# Altium PCB RelayBoard-multi.PcbDoc
Units mm, origin at the board's own origin, x right, y up, seen from the top; angles counter-clockwise.
Board outline 158.5 x 178.44 mm, 4 copper layers (L1, L2, L3, L4); 90 components, 72 nets, 343 pads, 15 vias.
Unrouted connection lines stored in the file: 1.
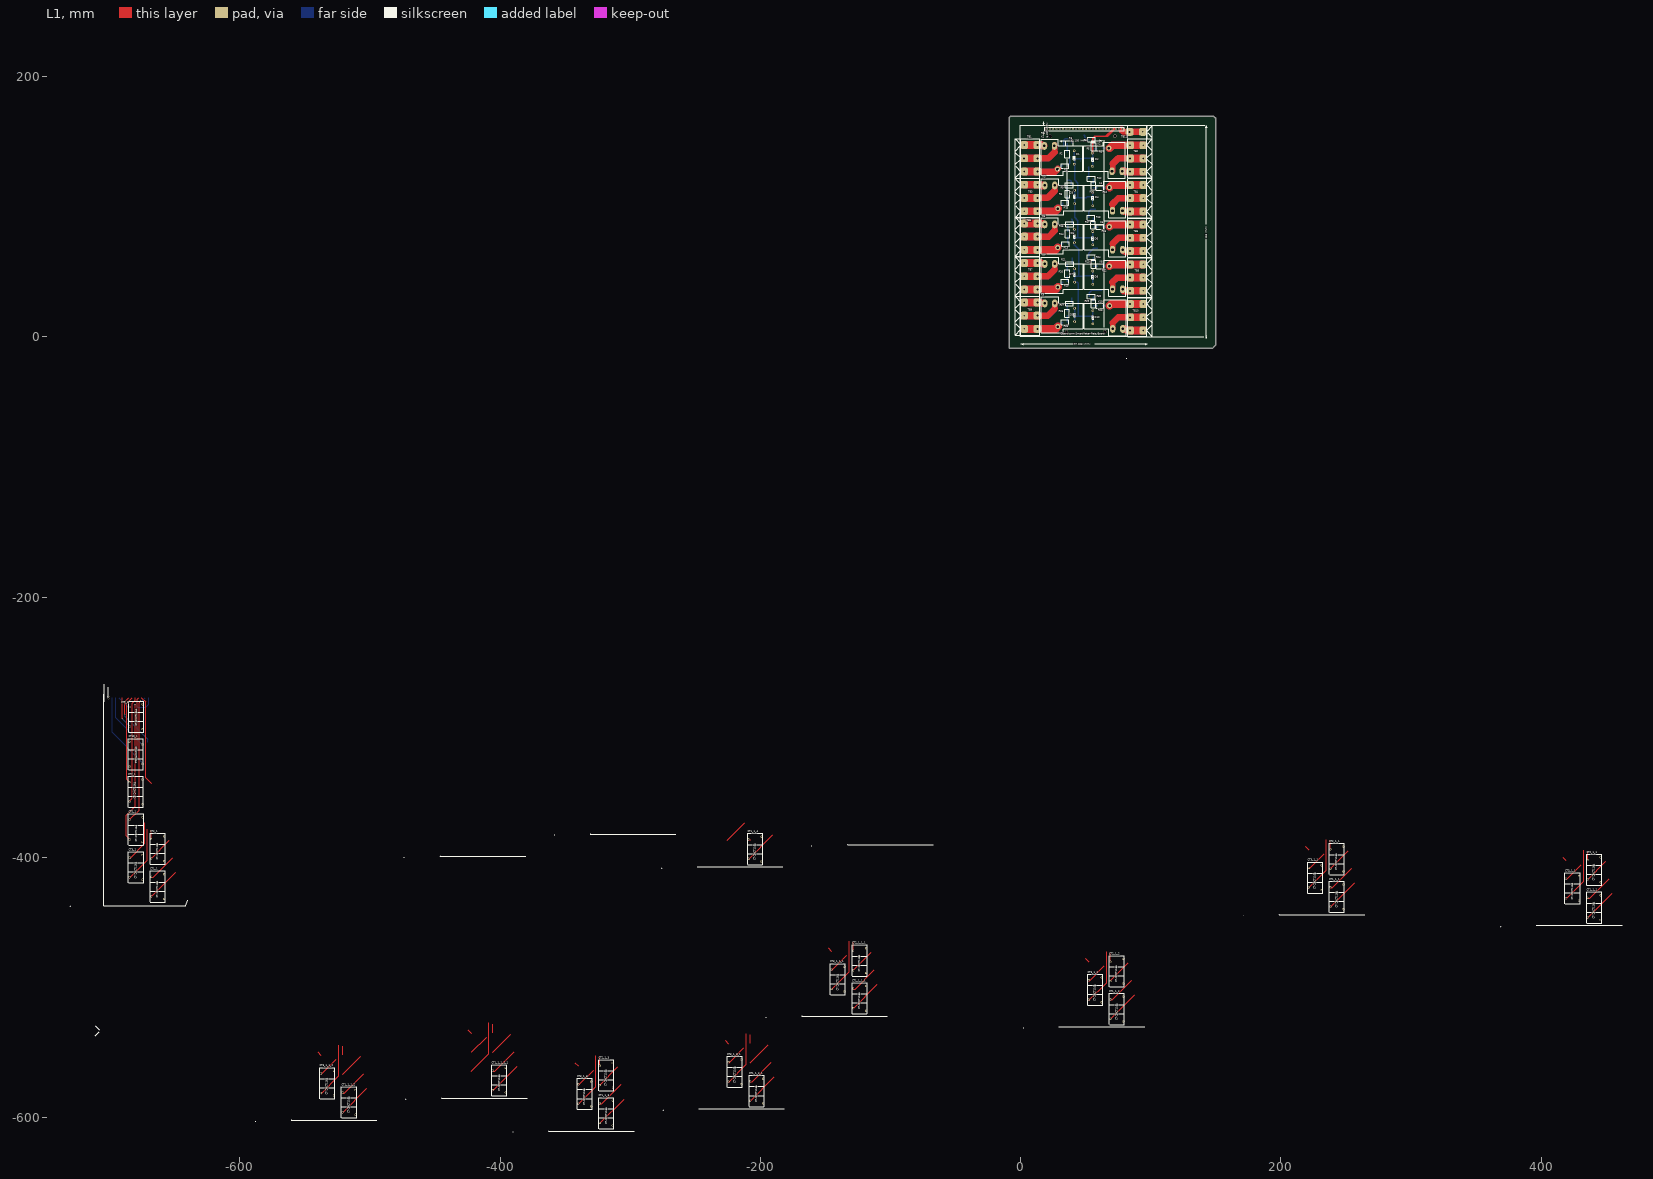
[diagram p0: L1 view]
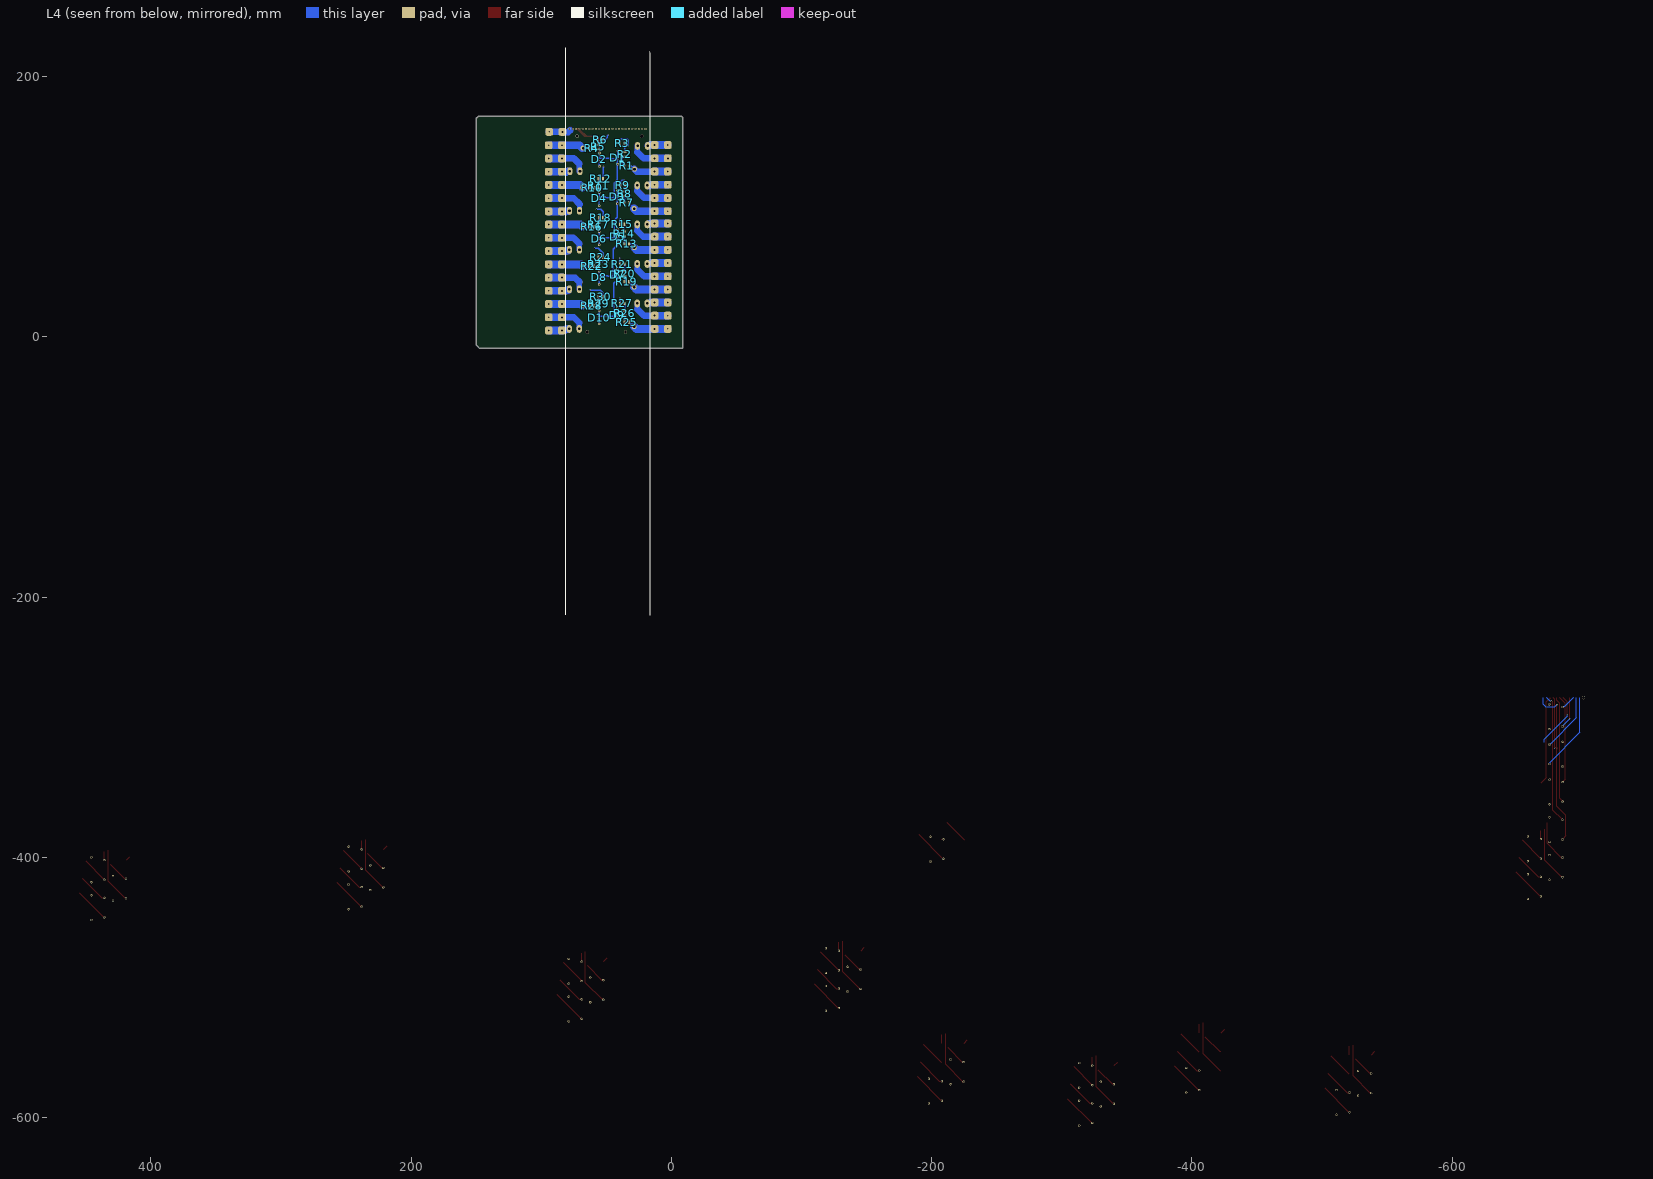
[diagram p1: L4 view, seen from below]
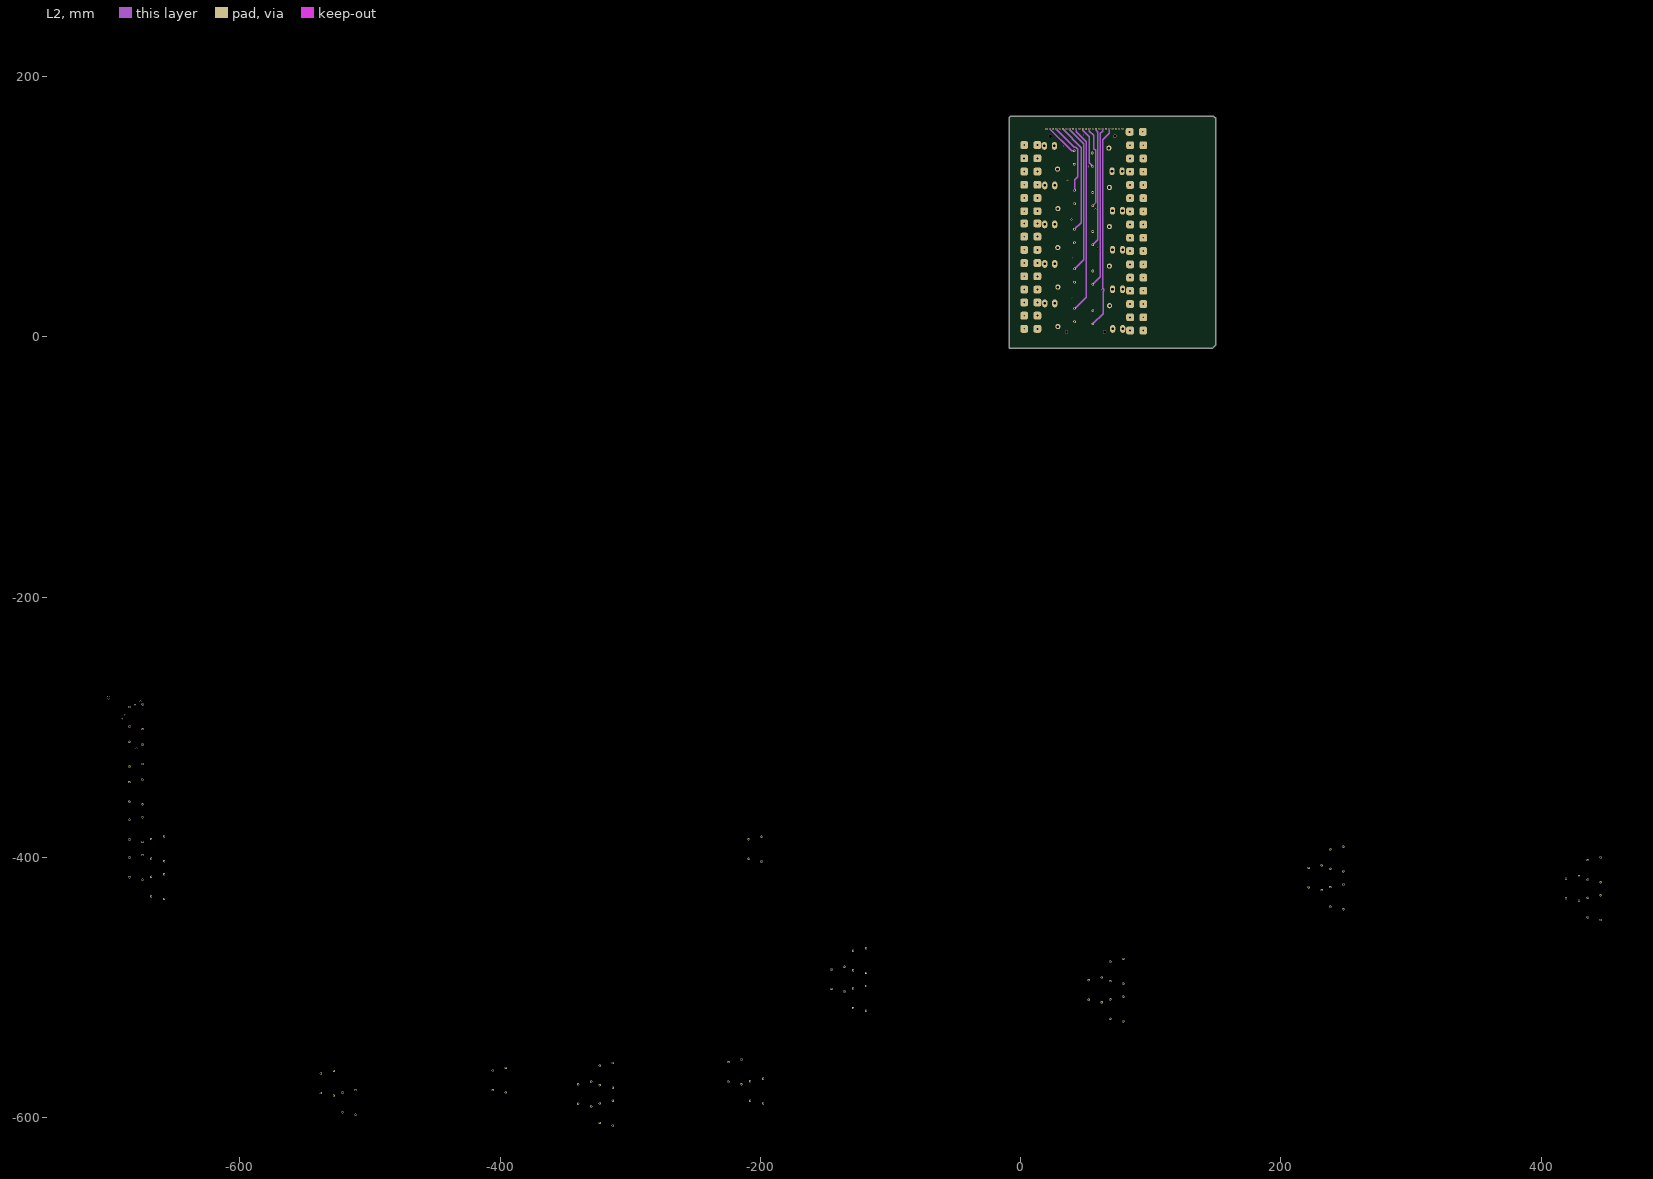
[diagram p2: L2]
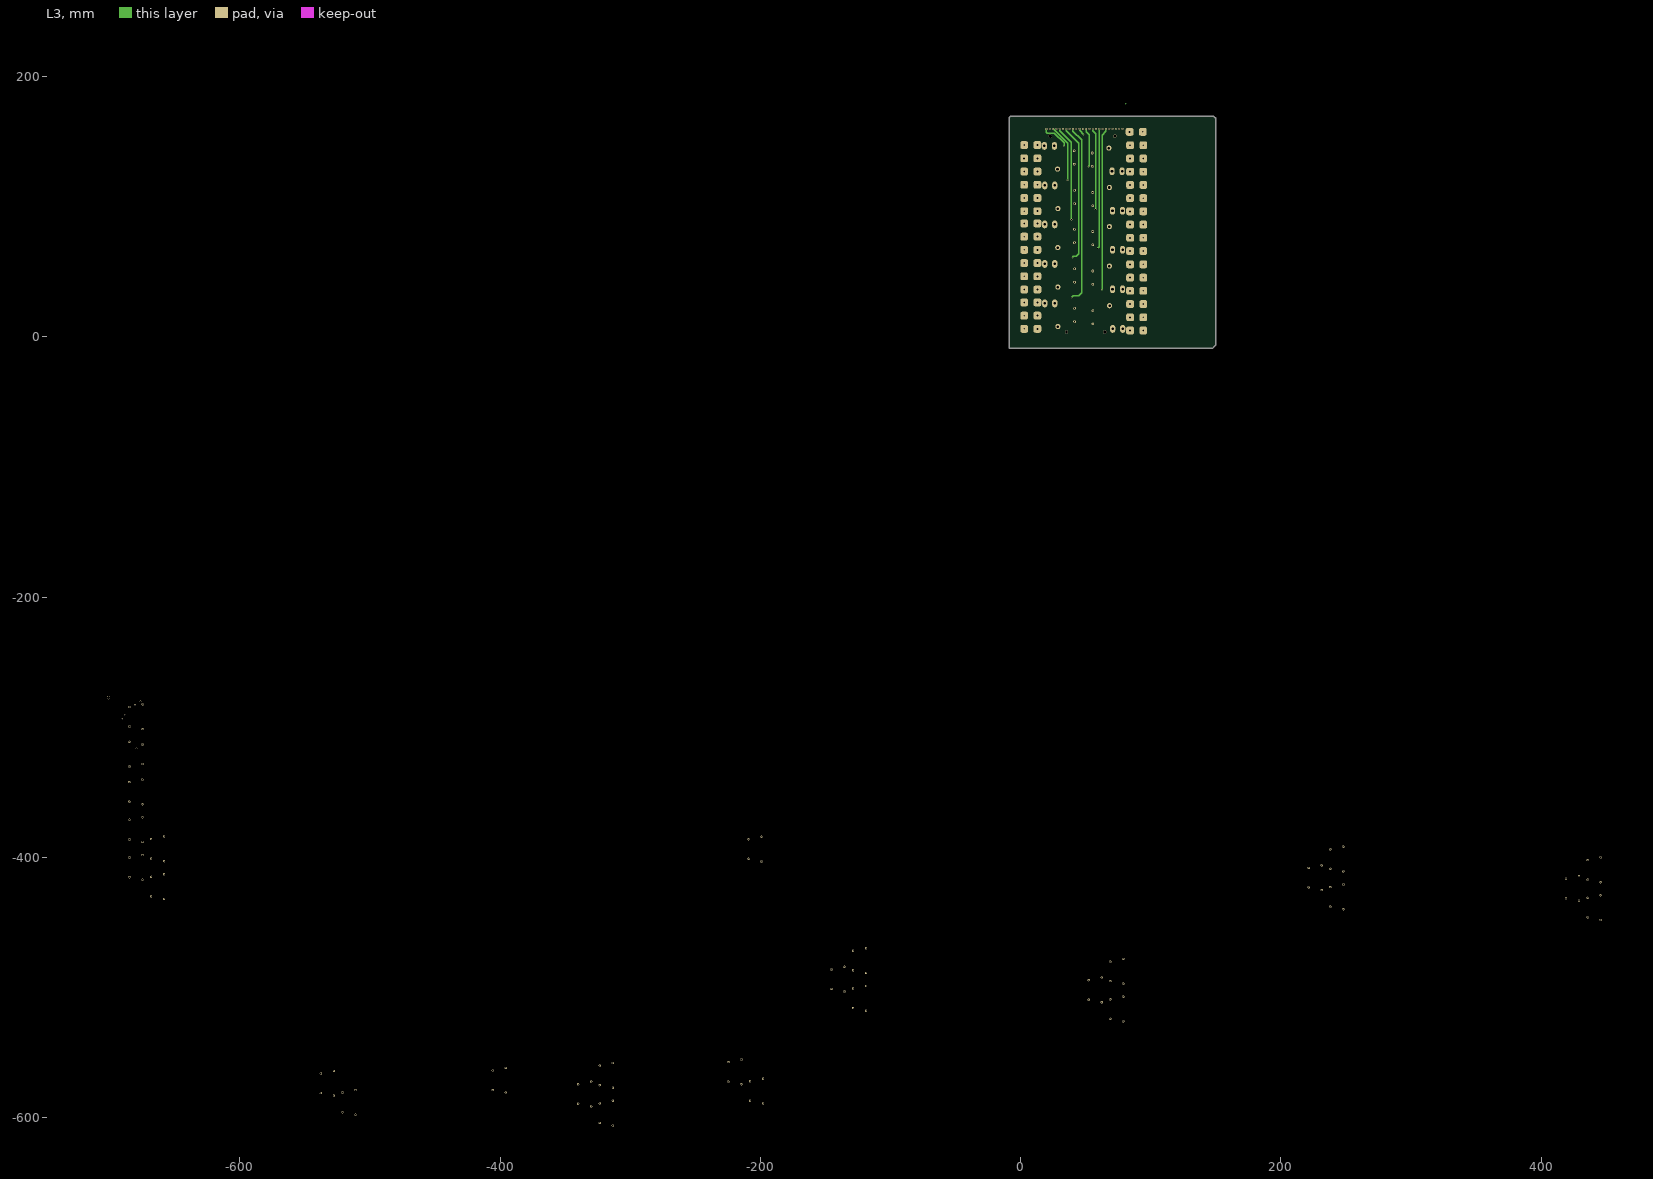
[diagram p3: L3]

## Layer stack, top to bottom
L1: signal copper 0.0356
Dielectric: core 0.32, FR-4, Dk 4.8
L2: signal copper 0.0356
Dielectric: prepreg 0.32, FR-4, Dk 4.8
L3: signal copper 0.0356
Dielectric: core 0.32, FR-4, Dk 4.8
L4: signal copper 0.0356

## Board outline
-8.636,-2.667 -8.636,168.783 -7.874,169.545 148.209,169.545 149.86,167.894 149.86,-3.937 149.86,-6.35 148.971,-7.239 147.32,-8.89 -8.636,-8.89 -8.636,-2.667

## Design rules (kind name [scope] priority, off if disabled: settings)
Clearance [All] p1: gap=0.254
PolygonConnect [All] p1: connectstyle=Relief reliefconductorwidth=0.254 reliefentries=4 polygonreliefangle="90 Angle" airgapwidth=0.254
RoutingVias [All] p1: holewidth=0.711 width=1.27 viastyle="Through Hole" minholewidth=0.559 minwidth=1.118 maxholewidth=0.711 maxwidth=1.27
SolderMaskExpansion [All] p1: expansion=0.102
Width [All] p1: maxlimit=10 minlimit=0.254 preferedwidth=0.254
28 further rules are at their usual default settings.

## Classes and differential pairs
component class RelayBoard-multi: D1 D2 D3 D4 D5 D6 D7 D8 D9 D10 K2 K3 K4 K5 K6 K7 K8 K9 K10 L1 L2 L3 L4 P1 R2 R3 R4 R5 R6 R7 R8 R9 R10 R11 R12 R13 R14 R15 R16 R17 R18 R19 R20 R21 R22 R23 R24 R25 R26 R27 R28 R29 R30 TB1 TB2 TB3 TB4 TB5 TB6 TB7 TB8 TB9 TB10

## Components (designator, comment, footprint, x,y, rotation, side; value= is the part's Value field where it differs from the comment)
CT1_1 "CurrentTransf" CT-ZMCT124 -668.241,-430.004 r90 top (schematic designator CT1)
CT1_1_1 "CurrentTransf" CT-ZMCT124 435.674,-446.16 r90 top (schematic designator CT1)
CT1_1_1 "CurrentTransf" CT-ZMCT124 237.935,-437.905 r90 top (schematic designator CT1)
CT1_1_1_1 "CurrentTransf" CT-ZMCT124 -128.841,-515.883 r90 top (schematic designator CT1)
CT1_1_1_1_1 "CurrentTransf" CT-ZMCT124 -405.732,-578.848 r90 top (schematic designator CT1)
CT1_1_1_2 "CurrentTransf" CT-ZMCT124 -521.175,-595.866 r90 top (schematic designator CT1)
CT1_1_2 "CurrentTransf" CT-ZMCT124 68.898,-524.138 r90 top (schematic designator CT1)
CT1_1_2_1 "CurrentTransf" CT-ZMCT124 -207.993,-587.103 r90 top (schematic designator CT1)
CT1_1_3 "CurrentTransf" CT-ZMCT124 -323.436,-604.121 r90 top (schematic designator CT1)
CT1_1_4 "CurrentTransf" CT-ZMCT124 -209.136,-401.175 r90 top (schematic designator CT1)
CT2_1 "CurrentTransf" CT-ZMCT124 -668.241,-400.971 r90 top (schematic designator CT2)
CT2_1_1 "CurrentTransf" CT-ZMCT124 435.674,-417.127 r90 top (schematic designator CT2)
CT2_1_1 "CurrentTransf" CT-ZMCT124 237.935,-408.872 r90 top (schematic designator CT2)
CT2_1_1_1 "CurrentTransf" CT-ZMCT124 -128.841,-486.85 r90 top (schematic designator CT2)
CT2_1_2 "CurrentTransf" CT-ZMCT124 68.898,-495.105 r90 top (schematic designator CT2)
CT2_1_3 "CurrentTransf" CT-ZMCT124 -323.436,-575.088 r90 top (schematic designator CT2)
CT3_1 "CurrentTransf" CT-ZMCT124 -684.878,-415.272 r90 top (schematic designator CT3)
CT3_1_1 "CurrentTransf" CT-ZMCT124 419.037,-431.428 r90 top (schematic designator CT3)
CT3_1_1 "CurrentTransf" CT-ZMCT124 221.298,-423.173 r90 top (schematic designator CT3)
CT3_1_1_1 "CurrentTransf" CT-ZMCT124 -145.478,-501.151 r90 top (schematic designator CT3)
CT3_1_1_2 "CurrentTransf" CT-ZMCT124 -537.812,-581.134 r90 top (schematic designator CT3)
CT3_1_2 "CurrentTransf" CT-ZMCT124 52.261,-509.406 r90 top (schematic designator CT3)
CT3_1_2_1 "CurrentTransf" CT-ZMCT124 -224.63,-572.371 r90 top (schematic designator CT3)
CT3_1_3 "CurrentTransf" CT-ZMCT124 -340.073,-589.389 r90 top (schematic designator CT3)
CT5_1 "CurrentTransf" CT-ZMCT124 -684.878,-386.189 r90 top (schematic designator CT5)
CT7_1 "CurrentTransf" CT-ZMCT124 -685.005,-357.233 r90 top (schematic designator CT7)
CT9_1 "CurrentTransf" CT-ZMCT124 -684.784,-299.48 r90 top (schematic designator CT9)
CT10_1 "CurrentTransf" CT-ZMCT124 -674.911,-313.277 r270 top (schematic designator CT10)
D1 "1N4148" SOD523 41.148,136.652 r90 top
D2 "1N4148" SOD523 55.372,137.209 r270 top
D3 "1N4148" SOD523 41.402,106.807 r90 top
D4 "1N4148" SOD523 55.372,107.491 r270 top
D5 "1N4148" SOD523 41.275,76.151 r90 top
D6 "1N4148" SOD523 55.372,76.327 r270 top
D7 "1N4148" SOD523 41.275,46.941 r90 top
D8 "1N4148" SOD523 55.372,46.736 r270 top
D9 "1N4148" SOD523 41.402,15.826 r90 top
D10 "1N4148" SOD523 55.499,15.67 r270 top
K1 "Comment" "Relay BT90"#1 28.308,128.885 r90 top
K2 "Relay-SPDT" "Relay BT90"#2 67.791,145.024 r270 top
K3 "Relay-SPDT" "Relay BT90"#2 28.602,98.522 r90 top
K4 "Relay-SPDT" "Relay BT90"#2 68.132,114.701 r270 top
K5 "Relay-SPDT" "Relay BT90"#2 28.515,68.56 r90 top
K6 "Relay-SPDT" "Relay BT90"#2 68.172,84.699 r270 top
K7 "Relay-SPDT" "Relay BT90"#2 28.562,38.207 r90 top
K8 "Relay-SPDT" "Relay BT90"#2 68.172,54.346 r270 top
K9 "Relay-SPDT" "Relay BT90"#2 28.562,7.854 r90 top
K10 "Relay-SPDT" "Relay BT90"#2 68.286,23.886 r270 top
P1 "Comment" HDR1X24 19.812,159.766 r0 top
R1 "270K/1%/.250" 1210C-GENERIC 35.814,131.318 r180 top
R2 "270K/1%/.250" 1210C-GENERIC 35.814,142.113 r270 top
R3 "270K/1%/.250" 1210C-GENERIC 39.243,148.717 r180 top
R4 "270K/1%/.250" 1210C-GENERIC 59.436,144.907 r0 top
R5 "270K/1%/.250" 1210C-GENERIC 56.134,147.828 r270 top
R6 "270K/1%/.250" 1210C-GENERIC 52.705,151.511 r0 top
R7 "270K/1%/.250" 1210C-GENERIC 35.814,102.997 r180 top
R8 "270K/1%/.250" 1210C-GENERIC 35.941,111.506 r270 top
R9 "270K/1%/.250" 1210C-GENERIC 39.116,116.459 r180 top
R10 "270K/1%/.250" 1210C-GENERIC 59.182,114.427 r0 top
R11 "270K/1%/.250" 1210C-GENERIC 55.88,117.729 r270 top
R12 "270K/1%/.250" 1210C-GENERIC 52.451,121.412 r0 top
R13 "270K/1%/.250" 1210C-GENERIC 36.068,71.374 r180 top
R14 "270K/1%/.250" 1210C-GENERIC 36.068,80.899 r270 top
R15 "270K/1%/.250" 1210C-GENERIC 39.37,86.487 r180 top
R16 "270K/1%/.250" 1210C-GENERIC 59.309,84.455 r0 top
R17 "270K/1%/.250" 1210C-GENERIC 55.626,87.63 r270 top
R18 "270K/1%/.250" 1210C-GENERIC 52.324,91.44 r0 top
R19 "270K/1%/.250" 1210C-GENERIC 35.814,42.291 r180 top
R20 "270K/1%/.250" 1210C-GENERIC 35.814,50.292 r270 top
R21 "270K/1%/.250" 1210C-GENERIC 39.37,55.88 r180 top
R22 "270K/1%/.250" 1210C-GENERIC 59.309,54.229 r0 top
R23 "270K/1%/.250" 1210C-GENERIC 55.88,57.531 r270 top
R24 "270K/1%/.250" 1210C-GENERIC 52.451,61.214 r0 top
R25 "270K/1%/.250" 1210C-GENERIC 35.814,11.176 r180 top
R26 "270K/1%/.250" 1210C-GENERIC 35.687,19.812 r270 top
R27 "270K/1%/.250" 1210C-GENERIC 39.243,25.654 r180 top
R28 "270K/1%/.250" 1210C-GENERIC 59.309,23.876 r0 top
R29 "270K/1%/.250" 1210C-GENERIC 55.88,27.178 r270 top
R30 "270K/1%/.250" 1210C-GENERIC 52.578,30.861 r0 top
TB1 "Comment" DG135-1#1 2.667,147.32 r270 top
TB2 "Comment" DG135-1#2 94.234,126.873 r90 top
TB3 "Comment" DG135-1#2 2.667,116.84 r270 top
TB4 "Comment" DG135-1#2 94.234,96.393 r90 top
TB5 "Comment" DG135-1#2 2.667,87.122 r270 top
TB6 "Comment" DG135-1#2 94.234,65.913 r90 top
TB7 "Comment" DG135-1#2 2.667,56.642 r270 top
TB8 "Comment" DG135-1#2 94.234,35.306 r90 top
TB9 "Comment" DG135-1#2 2.667,26.416 r270 top
TB10 "Comment" DG135-1#2 94.234,4.826 r90 top
TB11 "Comment" DG135-0 83.693,157.48 r0 top

## Footprints (in the part's own frame and the unit in brackets; to place one, negate y for a bottom-side part, rotate by r counter-clockwise, add the part's x,y. Pads: shape width x height; smd on the part's side, far side on the other; paste and mask are expansions set on the pad)
1210C-GENERIC [mil]
  rect 60x100 smd far side: 1(0,0) 2(135,0)
  silkscreen extent -50,-70 185,70, body extent -10,-50 145,50, height 46
CT-ZMCT124 [mm] "current transformer"
  round 1.7 hole 1.2: 1(0,0) 2(15,0) 3(-2,-10) 4(17,-10)
  silkscreen extent -4.5,-10.8 19.5,0.8
DG135-0 [mm]
  rrect50% 6x6 hole 1.5: 1(0,0)
  rrect50% 6x6 hole 1.3: 2(10.16,0)
  silkscreen extent -1.5,-5.2 13.4,5
DG135-1#1 [mm]
  rrect50% 6x6 hole 1.5: 1(0,10.16) 2(10.16,10.16) 2(10.16,0) 3(20.32,10.16)
  rrect50% 6x6 hole 1.4: 1(0,0) 3(20.32,0)
  silkscreen extent -4.8,-6.7 25.3,12
DG135-1#2 [mm]
  rrect50% 6x6 hole 1.5: 1(0,10.16) 2(10.16,10.16) 3(20.32,10.16)
  rrect50% 6x6 hole 1.3: 1(0,0) 2(10.16,0) 3(20.32,0)
  silkscreen extent -4.8,-6.7 25.3,12
HDR1X24 [mm] "Connector; Header; 24 Position"
  rect 1.5x1.5 hole 0.9: 1(0,0)
  round 1.5 hole 0.9: 2(2.54,0) 3(5.08,0) 4(7.62,0) 5(10.16,0) 6(12.7,0) 7(15.24,0) 8(17.78,0) 9(20.32,0) 10(22.86,0) 11(25.4,0) 12(27.94,0) 13(30.48,0) 14(33.02,0) 15(35.56,0) 16(38.1,0) 17(40.64,0) 18(43.18,0) 19(45.72,0) 20(48.26,0) 21(50.8,0) 22(53.34,0) 23(55.88,0) 24(58.42,0)
  silkscreen extent -1.27,-1.27 59.69,1.27
"Relay BT90"#1 [mm]
  round 2 hole 1: 1(3.8,-12.8) 2(14,-12.8)
  oval 6x4 hole 2: 3(17.8,10.1) 5(17.8,2.4)
  round 4 hole 2: 4(0,0)
  round 0 all layers, no hole: 6(8.9,-15.2)
  L4 lines w0.254: -0.3,-0.4 -0.3,-0.9 ; 6.4,-17.5 6.4,-17.7
  silkscreen extent -4.64,-19.4 23.1,12.7
"Relay BT90"#2 [mm]
  round 2 hole 1: 1(3.8,-12.8) 2(14,-12.8)
  oval 6x4 hole 2: 3(17.8,10.1) 5(17.8,2.4)
  round 4 hole 2: 4(0,0)
  round 0 all layers, no hole: 6(8.9,-15.2)
  silkscreen extent -4.64,-19.4 23.1,12.7
SOD523 [mm]
  rect 0.6x0.8 smd far side: A(1.7,0) K(0,0)
  silkscreen extent -0.5,-0.6 2.2,0.6, body extent -0.05,-0.53 1.75,0.55, height 0.53

## Part data
D1 D2 D3 D4 D5 D6 D7 D8 D9 D10: library part 1N4001, "1N4001"
K2 K3 K4 K5 K6 K7 K8 K9 K10: "Single-Pole Dual-Throw Relay"
R1 R2 R3 R4 R5 R6 R7 R8 R9 R10 R11 R12 R13 R14 R15 R16 R17 R18 R19 R20 R21 R22 R23 R24 R25 R26 R27 R28 R29 R30: library part Res3, "Resistor"

## Free pads (board coordinates)
  round 2.5 hole 2.5: 0(22.733,154.178) 0(35.212,3.766) 0(64.512,3.766) 0(72.39,154.266) 3(-701.04,-277.368)

## Via types
v1: diameter 1.27, hole 0.711, L2 to L4, 10 vias
v2: diameter 1.27, hole 0.711, L1 to L4, 5 vias

## Nets (pads, with @x,y where several pads share a name; then routed paths per layer and width w, separated by ;. In a path a pad name is that pad's centre, name@x,y a point inside that pad or via, vN(x,y) a via of type N, cw(c..) or ccw(c..) an arc to the next point about the centre after c; other vN are vias at no path point)
NetD1_A: D1.A K1.2 P1.2 | length 30.4
  L2 w1.2: P1.2 39.132,142.986 K1.2@41.362,142.986
  L4 w1: D1.A K1.2@41.148,142.772
NetD1_K: D1.K D2.K D3.K D4.K D5.K D6.K D7.K D8.K D9.K D10.K K1.1 K2.1 K3.1 K4.1 K5.1 K6.1 K7.1 K8.1 K9.1 K10.1 P1.21 P1.22 | length 263.3
  L1 w1: K2.1@55.399,141.107 55.399,152.046 57.404,154.051 65.405,154.051 70.612,159.258 P1.21 P1.22 72.39,159.766 66.675,154.051 66.04,154.051
  L4 w1: K9.1 41.362,15.786 D9.K 44.323,15.826 ; 43.942,107.315 43.942,117.983 41.362,120.563 41.362,136.438 D1.K 47.244,136.652 47.801,137.209 D2.K 55.399,137.236 K2.1@55.399,141.107 ; K4.1 55.332,107.531 51.27,107.531 50.546,106.807 D3.K K3.1 41.402,91.694 43.815,89.281 43.815,76.454 43.512,76.151 ; K8.1 D8.K 49.022,46.736 48.768,46.482 44.45,46.482 ; K6.1 D6.K 55.196,76.151 43.512,76.151 ; K10.1 55.499,20.073 D10.K 55.343,15.826 44.323,15.826 ; 43.512,76.151 D5.K 41.315,76.111 K5.1 41.315,70.572 44.45,67.437 44.45,46.482 ; 44.323,15.826 44.323,41.021 43.337,42.007 K7.1 41.362,46.442 41.402,46.482 44.45,46.482
NetD2_A: D2.A K2.2 P1.12 | length 36.6
  L2 w1: P1.12 47.752,158.623 52.705,153.67 52.705,133.601 K2.2@55.399,130.907
  L4 w1: D2.A 55.399,135.482 K2.2@55.399,130.907
NetD3_A: D3.A K3.2 P1.4 | length 59.8
  L2 w1: P1.4 27.432,159.385 41.021,145.796 42.164,145.796 43.942,144.018 43.942,123.07 41.415,120.543 41.415,112.535 K3.2
  L4 w1: D3.A K3.2
NetD4_A: D4.A K4.2 P1.14 | length 67
  L2 w0.5: K4.2 57.531,102.9
  L2 w1: P1.14 52.832,158.115 56.134,154.813 56.134,144.653 57.531,143.256 57.531,102.9
  L4 w0.5: K4.2 55.332,105.751 D4.A
NetD5_A: D5.A K5.2 P1.6 | length 89.9
  L2 w1: P1.6 32.512,159.385 46.482,145.415 46.482,87.727 K5.2
  L4 w1: D5.A 41.275,82.52 K5.2
NetD6_A: D6.A K6.2 P1.16 | length 95.3
  L2 w1: K6.2 55.499,70.699 59.309,74.509 59.309,157.226 57.912,158.623 P1.16
  L4 w1: K6.2 D6.A
NetD7_A: D7.A K7.2 P1.8 | length 118.6
  L2 w1: P1.8 37.592,159.131 48.514,148.209 48.514,59.359 K7.2
  L4 w0.254: K7.2@41.275,52.12 K7.2
  L4 w1: D7.A K7.2@41.275,52.12
NetD8_A: D8.A K8.2 P1.18 | length 127.3
  L2 w1: K8.2 61.214,46.188 61.214,156.337 62.992,158.115 P1.18
  L4 w1: K8.2 D8.A
NetD9_A: D9.A K9.2 P1.10 | length 149.5
  L2 w1: K9.2 41.92,21.854 50.419,30.353 50.419,149.987 42.672,157.734 P1.10
  L4 w1: K9.2 41.402,21.814 D9.A
NetD10_A: D10.A K10.2 P1.20 | length 159.8
  L2 w1: K10.2 63.246,17.646 63.246,34.993 63.746,35.493 63.746,36.643 62.992,37.397 62.992,151.384 68.072,156.464 P1.20
  L4 w0.254: K10.2 K10.2@55.499,9.899
  L4 w1: K10.2@55.499,9.899 D10.A
NetK1_3: K1.3 TB1.1 | length 22.8
  L1 w6: TB1.1@2.667,147.32 TB1.1@11.557,147.32 ; TB1.1@15.823,147.32 K1.3@17.627,146.786
  L4 w6: TB1.1@2.667,147.32 TB1.1@12.827,147.32 ; 15.849,147.346 K1.3@17.653,146.812
NetK1_4: K1.4 R1.2 TB1.3 | length 58.3
  L1 w5: TB1.3@12.827,127 26.576,127 K1.4@28.562,128.986
  L1 w6: TB1.3@2.667,127 TB1.3@12.827,127
  L4 w1: K1.4@28.562,128.986 31.021,131.445 R1.2@32.385,131.445
  L4 w5: TB1.3@12.827,127 26.576,127 K1.4@28.562,128.986
  L4 w6: TB1.3@2.667,127 TB1.3@12.827,127
NetK1_5: K1.5 TB1.2 | length 61.5
  L1 w4.2: 26.162,141.986 K1.5@26.162,147.701
  L1 w5: TB1.2@12.827,137.16 21.336,137.16 26.162,141.986
  L1 w6: TB1.2@2.667,137.16 TB1.2@12.827,137.16
  L4 w4.2: 26.162,141.986 K1.5@26.162,146.786
  L4 w5: TB1.2@12.827,137.16 21.336,137.16 26.162,141.986
  L4 w6: TB1.2@2.667,137.16 TB1.2@12.827,137.16
NetK2_3: K2.3 TB2.1 | length 24.1
  L1 w6: K2.3@79.196,127.381 81,126.847 ; TB2.1@84.074,126.873 TB2.1@94.234,126.873
  L4 w6: K2.3@79.222,127.28 81.026,126.746 ; TB2.1@84.074,126.873 TB2.1@94.234,126.873
NetK2_4: K2.4 R4.2 TB2.3 | length 59.1
  L1 w6: K2.4@68.199,144.907 70.485,147.193 84.074,147.193 TB2.3@94.234,147.193
  L4 w1: R4.2 67.674,144.907 K2.4 ; K2.4@68.072,145.034 K2.4@68.199,144.907
  L4 w6: K2.4@68.199,144.907 70.485,147.193 84.074,147.193 TB2.3@94.234,147.193
NetK2_5: K2.5 TB2.2 | length 62.2
  L1 w4.2: K2.5@70.599,127.107 70.599,132.829
  L1 w5: 70.599,132.829 74.803,137.033 TB2.2@84.074,137.033
  L1 w6: TB2.2@84.074,137.033 TB2.2@94.234,137.033
  L4 w4.2: K2.5@70.612,127.12 70.612,132.842
  L4 w5: 70.612,132.842 74.803,137.033 TB2.2@84.074,137.033
  L4 w6: TB2.2@84.074,137.033 TB2.2@94.234,137.033
NetK3_3: K3.3 TB3.1 | length 24.1
  L1 w6: TB3.1@2.667,116.84 TB3.1@12.827,116.84 ; TB3.1@15.061,116.84 K3.3@16.865,116.306
  L4 w6: TB3.1@2.667,116.84 TB3.1@12.827,116.84 ; TB3.1@14.96,116.866 K3.3@16.764,116.332
NetK3_4: K3.4 R7.2 TB3.3 | length 59.8
  L1 w6: TB3.3@2.667,96.52 12.827,96.52 26.677,96.52 K3.4@28.689,98.532
  L4 w1: K3.4 32.385,102.305 R7.2
  L4 w6: TB3.3@2.667,96.52 12.827,96.52 26.677,96.52 K3.4@28.689,98.532
NetK3_5: K3.5 TB3.2 | length 60
  L1 w4.2: 26.289,112.395 K3.5@26.289,116.332
  L1 w5: TB3.2@12.827,106.68 20.574,106.68 26.289,112.395
  L1 w6: TB3.2@2.667,106.68 TB3.2@12.827,106.68
  L4 w4.2: 26.289,112.141 K3.5@26.289,116.332
  L4 w5: TB3.2@12.827,106.68 20.828,106.68 26.289,112.141
  L4 w6: TB3.2@2.667,106.68 TB3.2@12.827,106.68
NetK4_3: K4.3 TB4.1 | length 24.1
  L1 w6: K4.3@79.323,96.774 TB4.1@81.127,96.24 ; TB4.1@84.074,96.393 TB4.1@94.234,96.393
  L4 w6: K4.3@79.248,96.774 81.052,96.24 ; TB4.1@84.074,96.393 TB4.1@94.234,96.393
NetK4_4: K4.4 R10.2 TB4.3 | length 59.5
  L1 w6: K4.4 70.144,116.713 84.074,116.713 TB4.3@94.234,116.713
  L4 w1: R10.2 62.885,114.701 K4.4
  L4 w6: K4.4 70.144,116.713 84.074,116.713 TB4.3@94.234,116.713
NetK4_5: K4.5 TB4.2 | length 61.4
  L1 w4.2: K4.5 70.532,102.028
  L1 w5: 70.532,102.028 75.057,106.553 TB4.2@84.074,106.553
  L1 w6: TB4.2@84.074,106.553 TB4.2@94.234,106.553
  L4 w4.2: K4.5 70.532,102.028
  L4 w5: 70.532,102.028 75.057,106.553 TB4.2@84.074,106.553
  L4 w6: TB4.2@84.074,106.553 TB4.2@94.234,106.553
NetK5_3: K5.3 TB5.1 | length 24.1
  L1 w6: TB5.1@2.667,87.122 TB5.1@12.827,87.122 ; TB5.1@15.188,87.122 K5.3@16.992,86.588
  L4 w6: TB5.1@2.667,87.122 TB5.1@12.827,87.122 ; TB5.1@15.24,87.122 K5.3@17.044,86.588
NetK5_4: K5.4 R13.2 TB5.3 | length 58.4
  L1 w6: TB5.3@2.667,66.802 12.827,66.802 26.757,66.802 K5.4
  L4 w1: K5.4 31.329,71.374 R13.2
  L4 w6: TB5.3@2.667,66.802 12.827,66.802 26.757,66.802 K5.4
NetK5_5: K5.5 TB5.2 | length 60.3
  L1 w4.2: 26.115,81.614 K5.5
  L1 w5: TB5.2@12.827,76.962 21.463,76.962 26.115,81.614
  L1 w6: TB5.2@2.667,76.962 TB5.2@12.827,76.962
  L4 w4.2: 26.162,81.534 K5.5@26.162,86.313
  L4 w5: TB5.2@12.827,76.962 21.59,76.962 26.162,81.534
  L4 w6: TB5.2@2.667,76.962 TB5.2@12.827,76.962
NetK6_3: K6.3 TB6.1 | length 24.1
  L1 w6: K6.3@79.323,66.167 TB6.1@81.127,65.633 ; TB6.1@84.074,65.913 TB6.1@94.234,65.913
  L4 w6: K6.3@79.476,66.32 TB6.1@81.28,65.786 ; TB6.1@84.074,65.913 TB6.1@94.234,65.913
NetK6_4: K6.4 R16.2 TB6.3 | length 58.9
  L1 w6: K6.4 69.706,86.233 84.074,86.233 TB6.3@94.234,86.233
  L4 w1: R16.2 62.982,84.699 K6.4
  L4 w6: K6.4 69.706,86.233 84.074,86.233 TB6.3@94.234,86.233
NetK6_5: K6.5 TB6.2 | length 60.3
  L1 w4.2: K6.5 70.572,71.461
  L1 w5: 70.572,71.461 75.184,76.073 TB6.2@84.074,76.073
  L1 w6: TB6.2@84.074,76.073 TB6.2@94.234,76.073
  L4 w4.2: K6.5 70.572,71.461
  L4 w5: 70.572,71.461 75.184,76.073 TB6.2@84.074,76.073
  L4 w6: TB6.2@84.074,76.073 TB6.2@94.234,76.073
NetK7_3: K7.3 TB7.1 | length 24.1
  L1 w6: TB7.1@2.667,56.642 TB7.1@12.827,56.642 ; TB7.1@15.188,56.642 K7.3@16.992,56.108
  L4 w6: TB7.1@2.667,56.642 TB7.1@12.827,56.642 ; TB7.1@15.468,56.668 K7.3@17.272,56.134
NetK7_4: K7.4 R19.2 TB7.3 | length 59
  L1 w6: TB7.3@2.667,36.322 12.827,36.322 26.677,36.322 K7.4
  L4 w1: K7.4 32.385,42.03 R19.2
  L4 w6: TB7.3@2.667,36.322 12.827,36.322 26.677,36.322 K7.4
NetK7_5: K7.5 TB7.2 | length 59.9
  L1 w4.2: 26.162,51.689 K7.5
  L1 w5: TB7.2@12.827,46.482 20.955,46.482 26.162,51.689
  L1 w6: TB7.2@2.667,46.482 TB7.2@12.827,46.482
  L4 w4.2: 26.162,51.689 K7.5
  L4 w5: TB7.2@12.827,46.482 20.955,46.482 26.162,51.689
  L4 w6: TB7.2@2.667,46.482 TB7.2@12.827,46.482
NetK8_3: K8.3 TB8.1 | length 24.1
  L1 w6: K8.3@79.323,35.687 TB8.1@81.127,35.153 ; TB8.1@84.074,35.306 TB8.1@94.234,35.306
  L4 w6: K8.3@79.222,35.84 81.026,35.306 ; TB8.1@84.074,35.306 TB8.1@94.234,35.306
NetK8_4: K8.4 R22.2 TB8.3 | length 58.7
  L1 w6: K8.4 69.452,55.626 84.074,55.626 TB8.3@94.234,55.626
  L4 w1: R22.2 62.855,54.346 K8.4
  L4 w6: K8.4 69.452,55.626 84.074,55.626 TB8.3@94.234,55.626
NetK8_5: K8.5 TB8.2 | length 61.4
  L1 w4.2: 70.421,41.974 70.572,41.823 K8.5
  L1 w5: 70.421,41.974 73.914,45.466 TB8.2@84.074,45.466
  L1 w6: TB8.2@84.074,45.466 TB8.2@94.234,45.466
  L4 w4.2: K8.5 70.572,42.124
  L4 w5: 70.572,42.124 73.914,45.466 TB8.2@84.074,45.466
  L4 w6: TB8.2@84.074,45.466 TB8.2@94.234,45.466
NetK9_3: K9.3 TB9.1 | length 24.1
  L1 w6: TB9.1@2.667,26.289 TB9.1@12.827,26.289 ; TB9.1@14.934,26.289 K9.3@16.738,25.755
  L4 w6: TB9.1@2.667,26.289 TB9.1@12.827,26.289 ; TB9.1@15.595,26.315 K9.3@17.399,25.781
NetK9_4: K9.4 R25.2 TB9.3 | length 58.6
  L1 w6: TB9.3@2.667,5.969 12.827,5.969 26.677,5.969 K9.4
  L4 w1: K9.4 29.063,7.854 R25.2
  L4 w6: TB9.3@2.667,5.969 12.827,5.969 26.677,5.969 K9.4
NetK9_5: K9.5 TB9.2 | length 59.9
  L1 w4.2: 26.162,21.463 K9.5
  L1 w5: TB9.2@12.827,16.129 20.828,16.129 26.162,21.463
  L1 w6: TB9.2@2.667,16.129 TB9.2@12.827,16.129
  L4 w4.2: 26.162,21.336 K9.5
  L4 w5: TB9.2@12.827,16.129 20.955,16.129 26.162,21.336
  L4 w6: TB9.2@2.667,16.129 TB9.2@12.827,16.129
NetK10_3: K10.3 TB10.1 | length 24.1
  L1 w6: K10.3@79.603,5.995 TB10.1@81.407,5.461 ; TB10.1@84.074,4.826 TB10.1@94.234,4.826
  L4 w6: K10.3@79.349,6.122 TB10.1@81.153,5.588 ; TB10.1@84.074,4.826 TB10.1@94.234,4.826
NetK10_4: K10.4 R28.2 TB10.3 | length 58.5
  L1 w6: K10.4 69.546,25.146 84.074,25.146 TB10.3@94.234,25.146
  L4 w1: R28.2 62.748,23.886 K10.4
  L4 w6: K10.4 69.546,25.146 84.074,25.146 TB10.3@94.234,25.146
NetK10_5: K10.5 TB10.2 | length 59.8
  L1 w4.2: K10.5@70.739,6.139 70.739,10.795
  L1 w5: 70.739,10.795 74.93,14.986 TB10.2@84.074,14.986
  L1 w6: TB10.2@84.074,14.986 TB10.2@94.234,14.986
  L4 w4.2: K10.5 70.686,10.742
  L4 w5: 70.686,10.742 74.93,14.986 TB10.2@84.074,14.986
  L4 w6: TB10.2@84.074,14.986 TB10.2@94.234,14.986
NetP1_1: P1.1 R3.1 | length 36.3
  L3 w1: P1.1 19.812,157.353 20.574,156.591 25.654,156.591 33.274,148.971 v1@33.274,146.304
  L4 w1: v1(33.147,146.304) 33.147,151.13 34.163,152.146 38.354,152.146 39.243,151.257 R3.1
NetP1_3: P1.3 R9.1 | length 50.2
  L3 w1: P1.3 36.068,148.59 36.068,120.523 v1(35.941,120.396)
  L4 w1: v1(35.941,120.396) 37.846,120.396 38.862,119.38 R9.1@38.862,116.586
NetP1_5: P1.5 R15.1 | length 77.4
  L3 w1: P1.5 29.972,158.369 38.989,149.352 v1(38.989,90.17)
  L4 w1: v1(38.989,90.17) 39.243,90.17 39.624,89.789 R15.1@39.624,86.487
NetP1_7: P1.7 R21.1 | length 111.3
  L3 w1: P1.7 34.925,159.639 34.925,158.242 44.45,148.717 44.45,63.627 42.672,61.849 40.259,61.849 v1(39.497,60.706)
  L4 w1: R21.1@39.497,55.88 v1(39.497,60.706)
NetP1_9: P1.9 R27.1 | length 142.7
  L3 w1: v1(39.243,29.972) 39.243,30.353 40.386,31.496 44.577,31.496 46.99,33.909 46.99,151.257 40.132,158.115 P1.9
  L4 w1: R27.1 39.243,29.718 39.116,29.845 v1(39.243,29.972)
NetP1_11: P1.11 R6.1 | length 12.4
  L3 w1: P1.11 45.212,158.623 v1(48.514,155.321)
  L4 w1: v1(48.514,155.321) 49.149,154.432 49.149,153.162 50.8,151.511 R6.1
NetP1_13: P1.13 R12.1 | length 39.9
  L3 w1: P1.13 50.292,157.607 52.578,155.321 52.578,131.572 v1(51.816,130.81)
  L4 w1: v1(51.816,130.81) 52.451,130.175 R12.1
NetP1_15: P1.15 R18.1 | length 73.6
  L3 w1: P1.15 55.372,158.496 57.658,156.21 57.658,98.044 v1(57.531,97.917)
  L4 w1: R18.1 52.324,96.266 53.848,97.79 53.848,97.917 v1(57.531,97.917)
NetP1_17: P1.17 R24.1 | length 103.6
  L3 w1: v1(59.182,67.945) 60.325,69.088 60.325,159.639 P1.17
  L4 w1: R24.1 52.451,64.135 56.261,67.945 v1(59.182,67.945)
NetP1_19: P1.19 R30.1 | length 138.7
  L3 w1: v1@62.484,35.941 62.484,154.94 65.532,157.988 P1.19
  L4 w1: R30.1 52.578,33.782 54.737,35.941 62.23,35.941 v1(62.357,36.068)
NetR1_1: R1.1 R2.2 | length 8.1
  L4 w1: R1.1 37.719,133.223 37.719,138.303 37.465,138.557
NetR2_1: R2.1 R3.2 | length 6.6
  L4 w1: R2.1@35.687,141.986 R3.2@35.687,148.59
NetR4_1: R4.1 R5.2 | length 2.8
  L4 w1: R5.2 R4.1@58.928,144.399
NetR5_1: R5.1 R6.2 | length 3.7
  L4 w1: R5.1 R6.2
NetR7_1: R7.1 R8.2 | length 5.1
  L4 w1.5: R8.2@35.687,108.077 35.814,107.95 R7.1
NetR8_1: R8.1 R9.2 | length 5
  L4 w1: R8.1@35.687,111.506 R9.2
NetR10_1: R10.1 R11.2 | length 3.4
  L4 w1: R11.2 56.007,114.427 R10.1
NetR11_1: R11.1 R12.2 | length 3.7
  L4 w1: R11.1 R12.2
NetR13_1: R13.1 R14.2 | length 6.1
  L4 w1: R13.1 R14.2
NetR14_1: R14.1 R15.2 | length 5.6
  L4 w1: R15.2 36.068,86.36 R14.1
NetR16_1: R16.1 R17.2 | length 3.8
  L4 w1: R17.2 59.055,84.201 R16.1
NetR17_1: R17.1 R18.2 | length 3.9
  L4 w1: R17.1 55.626,91.313 R18.2
NetR19_1: R19.1 R20.2 | length 4.6
  L4 w1: R19.1 R20.2
NetR20_1: R20.1 R21.2 | length 5.6
  L4 w1: R20.1 35.814,55.753 R21.2
NetR22_1: R22.1 R23.2 | length 3.5
  L4 w1: R23.2 56.007,54.229 R22.1
NetR23_1: R23.1 R24.2 | length 3.9
  L4 w1: 52.832,57.658 52.959,57.785 ; R23.1 R24.2
NetR25_1: R25.1 R26.2 | length 5.3
  L4 w1: R26.2 35.814,16.256 R25.1
NetR26_1: R26.1 R27.2 | length 5.9
  L4 w1: R26.1 35.687,25.527 R27.2
NetR28_1: R28.1 R29.2 | length 3.5
  L4 w1: R29.2 59.182,23.749 R28.1
NetR29_1: R29.1 R30.2 | length 3.7
  L4 w1: R29.1 55.88,30.734 R30.2
NewPhase: P1.23 P1.24 TB11.1 TB11.2 | length 34.9
  L1 w5: 77.47,159.004 79.248,157.226 83.693,157.226 83.947,157.48 TB11.2@94.107,157.48
  L4 w5: 77.47,158.877 79.121,157.226 83.693,157.226 83.947,157.48 TB11.2@94.107,157.48
pads on no net: CT1_1.1 CT1_1.2 CT1_1.3 CT1_1.4 CT1_1_1.1 CT1_1_1.2 CT1_1_1.3 CT1_1_1.4 CT1_1_1_1.1 CT1_1_1_1.2 CT1_1_1_1.3 CT1_1_1_1.4 CT1_1_1_1_1.1 CT1_1_1_1_1.2 CT1_1_1_1_1.3 CT1_1_1_1_1.4 CT1_1_1_2.1 CT1_1_1_2.2 CT1_1_1_2.3 CT1_1_1_2.4 CT1_1_2.1 CT1_1_2.2 CT1_1_2.3 CT1_1_2.4 CT1_1_2_1.1 CT1_1_2_1.2 CT1_1_2_1.3 CT1_1_2_1.4 CT1_1_3.1 CT1_1_3.2 CT1_1_3.3 CT1_1_3.4 CT1_1_4.1 CT1_1_4.2 CT1_1_4.3 CT1_1_4.4 CT2_1.1 CT2_1.2 CT2_1.3 CT2_1.4 CT2_1_1.1 CT2_1_1.2 CT2_1_1.3 CT2_1_1.4 CT2_1_1_1.1 CT2_1_1_1.2 CT2_1_1_1.3 CT2_1_1_1.4 CT2_1_2.1 CT2_1_2.2 CT2_1_2.3 CT2_1_2.4 CT2_1_3.1 CT2_1_3.2 CT2_1_3.3 CT2_1_3.4 CT3_1.1 CT3_1.2 CT3_1.3 CT3_1.4 CT3_1_1.1 CT3_1_1.2 CT3_1_1.3 CT3_1_1.4 CT3_1_1_1.1 CT3_1_1_1.2 CT3_1_1_1.3 CT3_1_1_1.4 CT3_1_1_2.1 CT3_1_1_2.2 CT3_1_1_2.3 CT3_1_1_2.4 CT3_1_2.1 CT3_1_2.2 CT3_1_2.3 CT3_1_2.4 CT3_1_2_1.1 CT3_1_2_1.2 CT3_1_2_1.3 CT3_1_2_1.4 CT3_1_3.1 CT3_1_3.2 CT3_1_3.3 CT3_1_3.4 CT5_1.1 CT5_1.2 CT5_1.3 CT5_1.4 CT7_1.1 CT7_1.2 CT7_1.3 CT7_1.4 CT9_1.1 CT9_1.2 CT9_1.3 CT9_1.4 CT10_1.1 CT10_1.2 CT10_1.3 CT10_1.4 K1.6 K2.6 K3.6 K4.6 K5.6 K6.6 K7.6 K8.6 K9.6 K10.6
copper on no net: | length 1968.3
  L1 w0.254: -684.751,-400.653 -684.244,-400.653 ; -675.259,-277.749 -675.259,-277.495 ; -672.503,-338.874 -672.465,-338.836 ; -537.685,-566.515 -537.178,-566.515 ; -422.242,-549.497 -421.735,-549.497 ; -339.946,-574.77 -339.439,-574.77 ; -224.503,-557.752 -223.996,-557.752 ; -145.351,-486.532 -144.844,-486.532 ; 52.388,-494.787 52.895,-494.787 ; 221.425,-408.554 221.932,-408.554 ; 419.164,-416.809 419.671,-416.809
  L1 w0.7: v2(-690.499,-293.624) -690.499,-277.495 ; v2(-688.467,-290.449) -688.467,-280.543 -685.419,-277.495 ; -684.878,-386.189 -687.451,-383.616 -687.451,-367.538 -680.593,-360.68 -680.593,-316.839 -680.689,-316.743 -680.689,-315.717 -680.593,-315.621 v2(-680.593,-282.829) ; -684.878,-371.189 -677.545,-363.856 -677.545,-281.28 v2@-676.427,-280.162 ; -684.878,-357.029 -682.625,-354.776 -682.625,-281.686 -680.339,-279.4 -680.339,-277.495 ; -684.878,-342.029 -686.816,-340.091 -686.816,-281.432 -682.879,-277.495 ; -684.751,-415.653 -671.195,-402.097 -671.195,-378.46 ; -684.244,-400.653 -672.973,-389.382 -672.973,-373.405 ; v2@-679.323,-316.23 -678.942,-315.849 -678.942,-278.638 -677.799,-277.495 ; -675.259,-277.749 -672.465,-280.543 -672.465,-287.655 -672.465,-338.836 ; -672.503,-338.874 -668.241,-343.136 ; -668.241,-430.385 -649.478,-411.622 ; -668.241,-415.385 -666.718,-415.385 -651.764,-400.431 ; -668.241,-400.921 -654.304,-386.984 ; -668.241,-385.921 -668.241,-379.443 ; -540.385,-549.478 -537.812,-552.051 ; -537.685,-581.515 -524.129,-567.959 -524.129,-544.322 ; -537.178,-566.515 -525.907,-555.244 ; -521.175,-596.247 -502.412,-577.484 ; -521.175,-581.247 -519.652,-581.247 -504.698,-566.293 ; -521.175,-566.783 -507.238,-552.846 ; -521.175,-551.783 -521.175,-545.305 ; -424.942,-532.46 -422.369,-535.033 ; -422.242,-564.497 -408.686,-550.941 -408.686,-527.304 ; -421.735,-549.497 -410.464,-538.226 ; -405.732,-579.229 -386.969,-560.466 ; -405.732,-564.229 -404.209,-564.229 -389.255,-549.275 ; -405.732,-549.765 -391.795,-535.828 ; -405.732,-534.765 -405.732,-528.287 ; -342.646,-557.733 -340.073,-560.306 ; -339.946,-589.77 -326.39,-576.214 -326.39,-552.577 ; -339.439,-574.77 -328.168,-563.499 ; -323.436,-604.502 -304.673,-585.739 ; -323.436,-589.502 -321.913,-589.502 -306.959,-574.548 ; -323.436,-575.038 -309.499,-561.101 ; -323.436,-560.038 -323.436,-553.56 ; -227.203,-540.715 -224.63,-543.288 ; -225.646,-386.824 -212.09,-373.268 ; -224.503,-572.752 -210.947,-559.196 -210.947,-535.559 ; -223.996,-557.752 -212.725,-546.481 ; -209.136,-401.556 -190.373,-382.793 ; -209.136,-386.556 -207.613,-386.556 ; -207.993,-587.484 -189.23,-568.721 ; -207.993,-572.484 -206.47,-572.484 -191.516,-557.53 ; -207.993,-558.02 -194.056,-544.083 ; -207.993,-543.02 -207.993,-536.542 ; -148.051,-469.495 -145.478,-472.068 ; -145.351,-501.532 -131.795,-487.976 -131.795,-464.339 ; -144.844,-486.532 -133.573,-475.261 ; -128.841,-516.264 -110.078,-497.501 ; -128.841,-501.264 -127.318,-501.264 -112.364,-486.31 ; -128.841,-486.8 -114.904,-472.863 ; -128.841,-471.8 -128.841,-465.322 ; 49.688,-477.75 52.261,-480.323 ; 52.388,-509.787 65.944,-496.231 65.944,-472.594 ; 52.895,-494.787 64.166,-483.516 ; 68.898,-524.519 87.661,-505.756 ; 68.898,-509.519 70.421,-509.519 85.375,-494.565 ; 68.898,-495.055 82.835,-481.118 ; 68.898,-480.055 68.898,-473.577 ; 218.725,-391.517 221.298,-394.09 ; 221.425,-423.554 234.981,-409.998 234.981,-386.361 ; 221.932,-408.554 233.203,-397.283 ; 237.935,-438.286 256.698,-419.523 ; 237.935,-423.286 239.458,-423.286 254.412,-408.332 ; 237.935,-408.822 251.872,-394.885 ; 237.935,-393.822 237.935,-387.344 ; 416.464,-399.772 419.037,-402.345 ; 419.164,-431.809 432.72,-418.253 432.72,-394.616 ; 419.671,-416.809 430.942,-405.538 ; 435.674,-446.541 454.437,-427.778 ; 435.674,-431.541 437.197,-431.541 452.151,-416.587 ; 435.674,-417.077 449.611,-403.14 ; 435.674,-402.077 435.674,-395.599
  L3 w0.254: 80.803,179.17 80.93,179.297
  L4 w0.254: v2(-690.499,-293.624) v2@-690.443,-293.568 ; v2@-679.45,-316.611 v2(-679.45,-316.23) ; -675.013,-328.43 -675.013,-327.16
  L4 w0.7: -698.119,-277.495 -698.119,-304.053 -675.013,-327.16 ; -695.579,-277.495 -695.579,-292.863 -674.911,-313.531 ; -693.039,-277.495 -686.054,-284.48 -684.784,-284.48 ; v2@-690.443,-293.568 -684.53,-299.48 ; v2(-688.467,-290.449) -688.467,-291.719 -670.814,-309.372 -670.814,-311.545 ; v2(-680.593,-282.829) -678.688,-284.734 -672.465,-284.734 -670.179,-282.448 -670.179,-277.495 ; v2(-676.402,-280.162) -675.386,-280.162 -672.719,-277.495

## Silkscreen, mask and mechanical layers (free items; w line width, h text height)
Top Overlay:
  lines w0.254: -730.631,-437.261 -730.377,-437.515 ; -711.169,-536.956 -708.152,-533.939 ; -711.073,-529.463 -708.152,-532.384 ; -704.469,-274.828 -704.469,-437.134 -659.13,-437.134 -641.604,-437.134 -640.207,-433.006 ; -704.361,-267.104 -704.361,-280.27 -704.342,-280.289 ; -701.04,-277.368 -701.04,-269.367 ; -588.264,-602.742 -588.01,-602.996 ; -560.705,-601.853 -560.451,-602.107 ; -473.964,-399.796 -473.71,-400.05 ; -472.821,-585.724 -472.567,-585.978 ; -446.405,-398.907 -446.151,-399.161 ; -445.262,-584.835 -445.008,-585.089 ; -390.525,-610.997 -390.271,-611.251 ; -362.966,-610.108 -362.712,-610.362 ; -358.521,-382.778 -358.267,-383.032 ; -330.962,-381.889 -330.708,-382.143 ; -276.225,-408.051 -275.971,-408.305 ; -275.082,-593.979 -274.828,-594.233 ; -248.666,-407.162 -248.412,-407.416 ; -247.523,-593.09 -247.269,-593.344 ; -195.93,-522.759 -195.676,-523.013 ; -168.371,-521.87 -168.117,-522.124 ; -160.782,-391.033 -160.528,-391.287 ; -133.223,-390.144 -132.969,-390.398 ; 0.277,-5.69 0.277,-5.182 ; 1.801,-5.944 0.277,-5.436 ; 1.801,-4.928 0.277,-5.436 ; 1.809,-531.014 2.063,-531.268 ; 17.018,155.956 17.526,157.48 ; 17.018,164.211 17.526,162.687 ; 17.272,157.48 17.78,157.48 ; 17.272,162.687 17.78,162.687 ; 17.526,154.94 17.526,157.48 ; 17.526,165.227 17.526,162.687 ; 18.034,155.956 17.526,157.48 ; 18.034,164.211 17.526,162.687 ; 29.368,-530.125 29.622,-530.379 ; 30.124,150.817 30.127,150.309 ; 31.647,151.08 30.125,150.563 ; 31.652,150.064 30.125,150.563 ; 35.686,98.298 35.814,98.426 35.814,136.525 ; 38.281,150.61 30.125,150.563 ; 40.767,-5.436 0.277,-5.436 ; 54.075,150.702 62.23,150.749 ; 56.815,-5.436 97.305,-5.436 ; 60.703,151.248 62.23,150.749 ; 60.709,150.232 62.23,150.749 ; 62.229,151.003 62.231,150.495 ; 64.262,7.493 64.262,151.13 ; 81.184,-16.664 81.311,-16.537 ; 89.566,162.687 141.609,162.687 ; 95.781,-5.944 97.305,-5.436 ; 95.781,-4.928 97.305,-5.436 ; 96.266,162.687 100.711,162.687 100.934,162.464 100.934,152.173 ; 96.774,153.289 97.028,153.289 ; 97.059,-0.027 140.716,-0.027 ; 97.305,-5.69 97.305,-5.182 ; 97.536,156.718 100.838,153.416 ; 97.536,158.273 100.886,161.623 ; 142.113,0.772 142.621,-0.752 ; 142.113,160.724 142.621,162.248 ; 142.367,-0.752 142.875,-0.752 ; 142.367,162.248 142.875,162.248 ; 142.621,75.01 142.621,-0.752 ; 142.621,86.487 142.621,162.248 ; 143.129,0.772 142.621,-0.752 ; 143.129,160.724 142.621,162.248 ; 170.846,-444.781 171.1,-445.035 ; 198.405,-443.892 198.659,-444.146 ; 368.585,-453.036 368.839,-453.29 ; 396.144,-452.147 396.398,-452.401
  lines w0.5: -560.451,-602.107 -494.728,-602.107 ; -446.151,-399.161 -380.428,-399.161 ; -445.008,-585.089 -379.285,-585.089 ; -362.712,-610.362 -296.989,-610.362 ; -330.708,-382.143 -264.986,-382.143 ; -248.412,-407.416 -182.689,-407.416 ; -247.269,-593.344 -181.546,-593.344 ; -168.117,-522.124 -102.394,-522.124 ; -132.969,-390.398 -67.246,-390.398 ; 29.622,-530.379 95.345,-530.379 ; 96.901,153.035 96.901,159.131 96.901,162.687 -0.254,162.687 -0.254,0.227 96.782,0.227 96.901,153.289 ; 198.659,-444.146 264.382,-444.146 ; 396.398,-452.401 462.121,-452.401
  text "5.207 (mm)" at 21.183,153.075 h1.52 r90
  text "32.105 (mm)" at 38.54,149.698 h1.52 r0.33
  text "163 (mm)" at 143.535,75.264 h1.52 r90
  text "Openstorm-SmartMeter-RelayBoard" at 30.607,0.635 h2.5
  text "97.028 (mm)" at 41.021,-6.35 h1.52
Bottom Overlay:
  lines w0.254: 16.033,-214.122 16.033,218.286 16.668,218.921 ; 81.026,-213.487 81.184,221.969

## Text inside footprints (layer, text, board x,y; h text height)
CT1_1: Top Overlay "CT-ZMCT116A" at -662.653,-431.006 h1.52 r90
CT1_1_1: Top Overlay "CT-ZMCT116A" at 441.262,-447.162 h1.52 r90
CT1_1_1: Top Overlay "CT-ZMCT116A" at 243.523,-438.907 h1.52 r90
CT1_1_1_1: Top Overlay "CT-ZMCT116A" at -123.253,-516.885 h1.52 r90
CT1_1_1_1_1: Top Overlay "CT-ZMCT116A" at -400.144,-579.85 h1.52 r90
CT1_1_1_2: Top Overlay "CT-ZMCT116A" at -515.587,-596.868 h1.52 r90
CT1_1_2: Top Overlay "CT-ZMCT116A" at 74.486,-525.14 h1.52 r90
CT1_1_2_1: Top Overlay "CT-ZMCT116A" at -202.405,-588.105 h1.52 r90
CT1_1_3: Top Overlay "CT-ZMCT116A" at -317.848,-605.123 h1.52 r90
CT1_1_4: Top Overlay "CT-ZMCT116A" at -203.548,-402.177 h1.52 r90
CT2_1: Top Overlay "CT-ZMCT116A" at -662.78,-401.987 h1.52 r90
CT2_1_1: Top Overlay "CT-ZMCT116A" at 441.135,-418.143 h1.52 r90
CT2_1_1: Top Overlay "CT-ZMCT116A" at 243.396,-409.888 h1.52 r90
CT2_1_1_1: Top Overlay "CT-ZMCT116A" at -123.38,-487.866 h1.52 r90
CT2_1_2: Top Overlay "CT-ZMCT116A" at 74.359,-496.121 h1.52 r90
CT2_1_3: Top Overlay "CT-ZMCT116A" at -317.975,-576.104 h1.52 r90
CT3_1: Top Overlay "CT-ZMCT116A" at -679.417,-416.528 h1.52 r90
CT3_1_1: Top Overlay "CT-ZMCT116A" at 424.498,-432.684 h1.52 r90
CT3_1_1: Top Overlay "CT-ZMCT116A" at 226.759,-424.429 h1.52 r90
CT3_1_1_1: Top Overlay "CT-ZMCT116A" at -140.017,-502.407 h1.52 r90
CT3_1_1_2: Top Overlay "CT-ZMCT116A" at -532.351,-582.39 h1.52 r90
CT3_1_2: Top Overlay "CT-ZMCT116A" at 57.722,-510.662 h1.52 r90
CT3_1_2_1: Top Overlay "CT-ZMCT116A" at -219.169,-573.627 h1.52 r90
CT3_1_3: Top Overlay "CT-ZMCT116A" at -334.612,-590.645 h1.52 r90
CT5_1: Top Overlay "CT-ZMCT116A" at -678.909,-387.953 h1.52 r90
CT7_1: Top Overlay "CT-ZMCT116A" at -680.052,-355.06 h1.52 r90
CT9_1: Top Overlay "CT-ZMCT116A" at -678.942,-298.972 h1.52 r90
CT10_1: Top Overlay "CT-ZMCT116A" at -680.372,-314.928 h1.52 r270